# Altium PCB PCB_button.PcbDoc
Units mm, origin at the board's own origin, x right, y up, seen from the top; angles counter-clockwise.
Board outline 35.05 x 27.18 mm, 2 copper layers (Top Layer, Bottom Layer); 6 components, 12 nets, 42 pads, 4 vias.
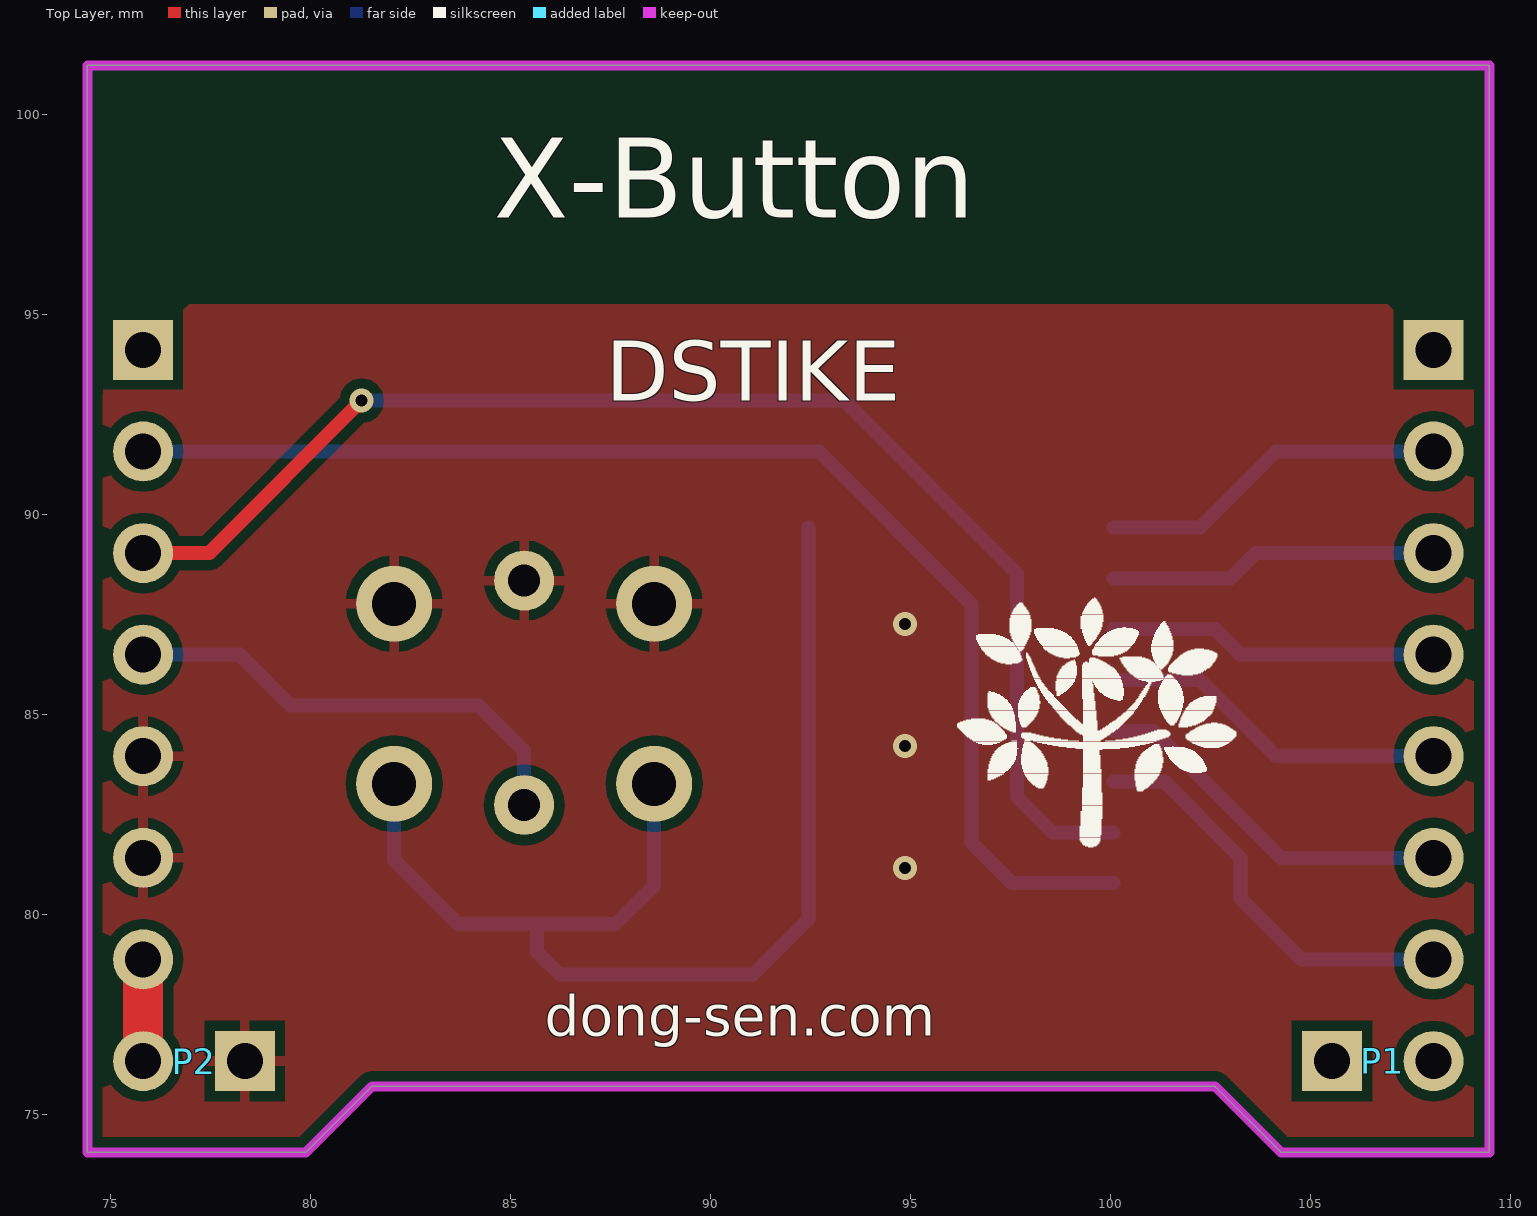
[diagram p0: Top Layer view]
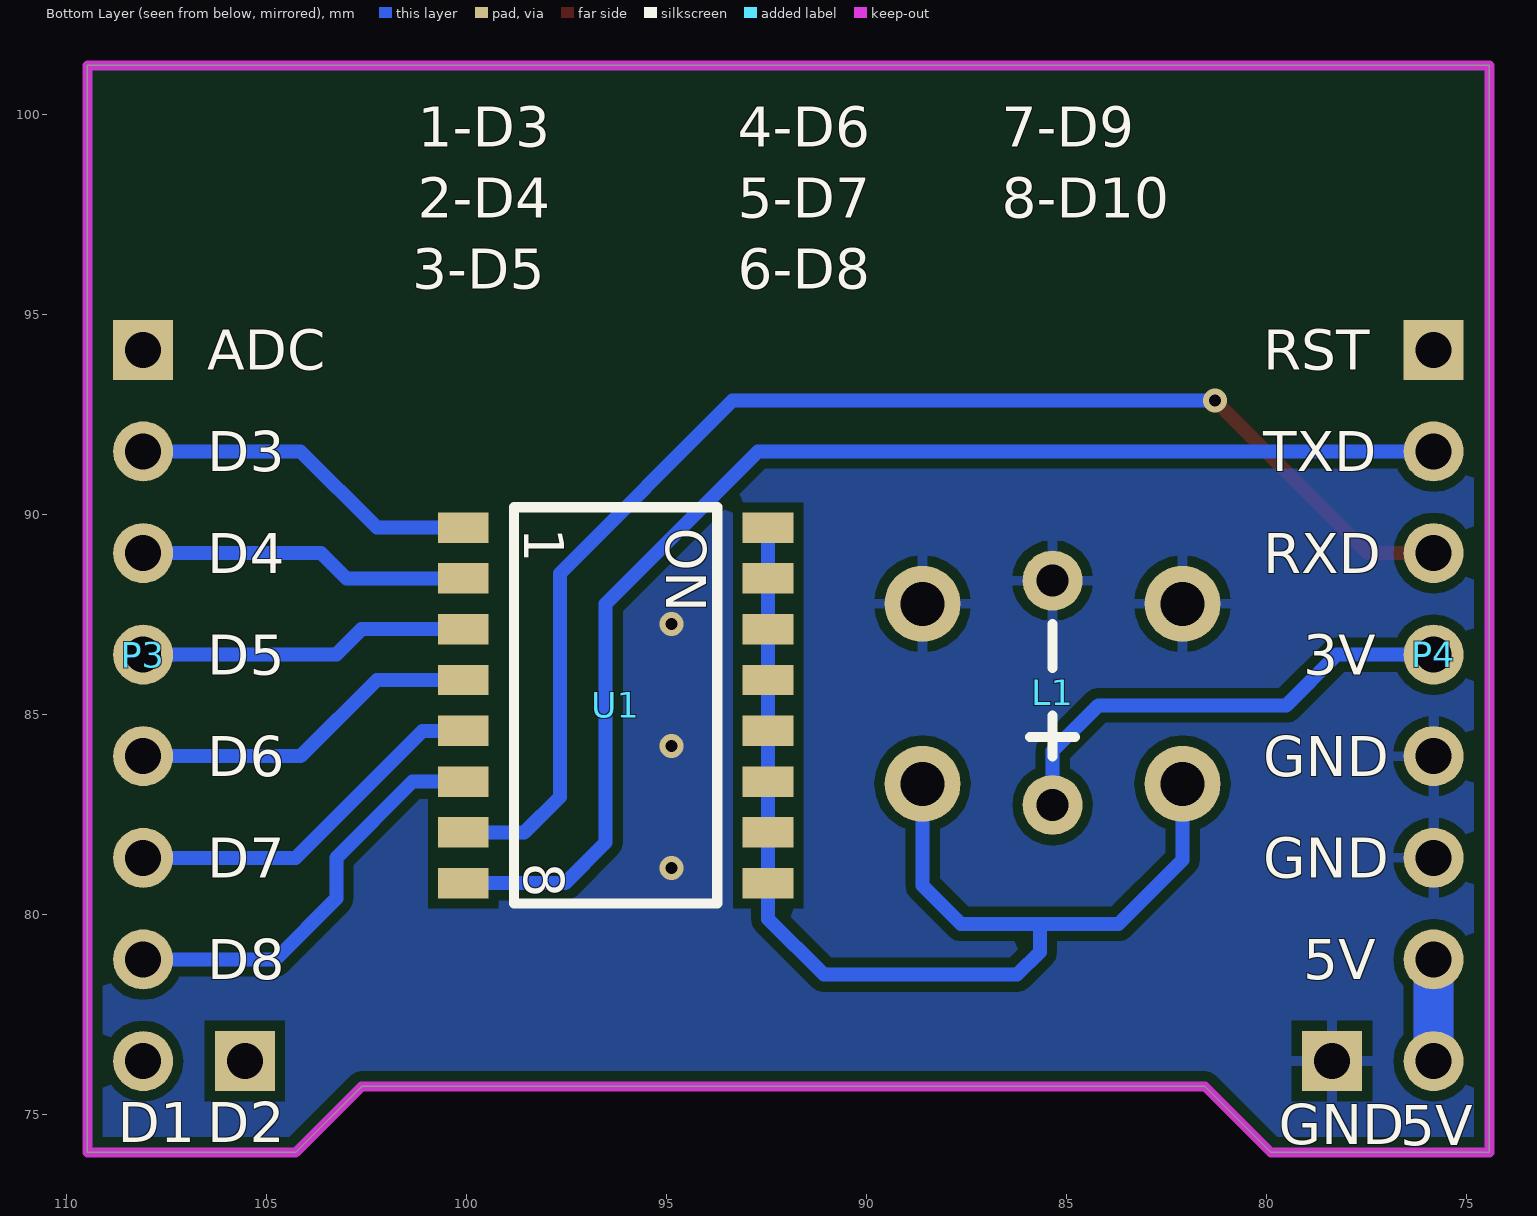
[diagram p1: Bottom Layer view, seen from below]

## Layer stack, top to bottom
Top Solder: solder mask 0.0102, Solder Resist, Dk 3.5
Top Layer: signal copper 0.0356
Dielectric 1: dielectric 0.32, FR-4, Dk 4.8
Bottom Layer: signal copper 0.0356
Bottom Solder: solder mask 0.0102, Solder Resist, Dk 3.5

## Board outline
74.422,74.041 74.422,101.219 109.474,101.219 109.474,74.041 104.267,74.041 102.616,75.692 81.534,75.692 79.883,74.041

## Design rules (kind name [scope] priority, off if disabled: settings)
Clearance [All] p1: gap=0.254
PolygonConnect PolygonConnect_via [IsVia] p1: connectstyle=Direct reliefconductorwidth=0.254 reliefentries=4 polygonreliefangle="90 Angle" airgapwidth=0.254
PolygonConnect [All] p2: connectstyle=Relief reliefconductorwidth=0.254 reliefentries=4 polygonreliefangle="90 Angle" airgapwidth=0.254
RoutingVias [All] p1: holewidth=0.711 width=1.27 viastyle="Through Hole" minholewidth=0.711 minwidth=1.27 maxholewidth=0.711 maxwidth=1.27
SolderMaskExpansion [All] p1: expansion=0.102
Width [All] p1: maxlimit=1 minlimit=0.254 preferedwidth=0.254
30 further rules are at their usual default settings.

## Components (designator, comment, footprint, x,y, rotation, side; value= is the part's Value field where it differs from the comment)
L1 "button" LEDBUTTON 85.344,87.757 r0 bottom
P1 "Header 2" HDR1X2 105.537,76.327 r0 top
P2 "Header 2" HDR1X2 78.359,76.327 r180 top
P3 "Header 7" HDR1X7 108.077,94.107 r270 bottom
P4 "Header 7" HDR1X7 75.819,94.107 r270 bottom
U1 "1.27mmSwitch" NUMBERSWITCH 100.076,89.662 r270 bottom

## Footprints (in the part's own frame and the unit in brackets; to place one, negate y for a bottom-side part, rotate by r counter-clockwise, add the part's x,y. Pads: shape width x height; smd on the part's side, far side on the other; paste and mask are expansions set on the pad)
HDR1X2 [mm] "Connector; Header; 2 Position"
  rect 1.5x1.5 hole 0.9: 1(0,0)
  round 1.5 hole 0.9: 2(2.54,0)
HDR1X7 [mm] "Connector; Header; 7 Position"
  rect 1.5x1.5 hole 0.9: 1(0,0)
  round 1.5 hole 0.9: 2(2.54,0) 3(5.08,0) 4(7.62,0) 5(10.16,0) 6(12.7,0) 7(15.24,0)
LEDBUTTON [mm]
  round 1.9 hole 1.1: 1(-3.25,4.5) 2(3.25,4.5) 5(3.25,0) 6(-3.25,0)
  round 1.5 hole 0.8: 3(0,5.029) 4(0,-0.581)
  silkscreen extent -0.56,0.51 0.56,3.81
NUMBERSWITCH [mm]
  rect 0.76x1.27 smd: 1(0,0) 2(1.27,0) 3(2.54,0) 4(3.81,0) 5(5.08,0) 6(6.35,0) 7(7.62,0) 8(8.89,0) 9(8.89,7.62) 10(7.62,7.62) 11(6.35,7.62) 12(5.08,7.62) 13(3.81,7.62) 14(2.54,7.62) 15(1.27,7.62) 16(0,7.62)
  silkscreen extent -0.51,1.27 9.4,6.35

## Part data
L1: library part LEDbutton, "蓝色LED按键"
P1 P2: "Header, 2-Pin"
P3 P4: "Header, 7-Pin"
U1: library part NumberSwitch, "拨码开关"

## Free pads (board coordinates)
  round 3 on Keep-Out: ""(76.962,98.679) ""(106.934,98.679)

## Via types
v1: diameter 0.6, hole 0.3, Top Layer to Bottom Layer, tented both sides, 4 vias

## Nets (pads, with @x,y where several pads share a name; then routed paths per layer and width w, separated by ;. In a path a pad name is that pad's centre, name@x,y a point inside that pad or via, vN(x,y) a via of type N, cw(c..) or ccw(c..) an arc to the next point about the centre after c; other vN are vias at no path point)
D3: P3.2 U1.1 | length 8.8
  Bottom Layer w0.35: U1.1 102.235,89.662 104.14,91.567 P3.2
D4: P3.3 U1.2 | length 8.3
  Bottom Layer w0.35: U1.2 102.997,88.392 103.632,89.027 P3.3
D5: P3.4 U1.3 | length 8.3
  Bottom Layer w0.35: U1.3 102.616,87.122 103.251,86.487 P3.4
D6: P3.5 U1.4 | length 8.8
  Bottom Layer w0.35: U1.4 102.235,85.852 104.14,83.947 P3.5
D7: P3.6 U1.5 | length 9.3
  Bottom Layer w0.35: U1.5 101.092,84.582 104.267,81.407 P3.6
D8: P3.7 U1.6 | length 10.4
  Bottom Layer w0.35: U1.6 101.346,83.312 103.251,81.407 103.251,80.391 104.775,78.867 P3.7
D9: P4.3 U1.7 | length 33.6
  Top Layer w0.35: P4.3 77.47,89.027 v1(81.28,92.837)
  Bottom Layer w0.35: v1(81.28,92.837) 93.345,92.837 97.663,88.519 97.663,82.931 98.552,82.042 U1.7
D10: P4.2 U1.8 | length 32.2
  Bottom Layer w0.35: P4.2 92.71,91.567 96.52,87.757 96.52,81.788 97.536,80.772 U1.8
GND: L1.4 L1.5 L1.6 P2.1 P4.5 P4.6
  other v1: 94.869,81.153 94.869,84.201 94.869,87.249
NetL1_1: L1.1 L1.2 U1.9 U1.10 U1.11 U1.12 U1.13 U1.14 U1.15 U1.16 | length 30.8
  Bottom Layer w0.35: L1.1 82.094,81.355 83.693,79.756 85.661,79.756 ; L1.2@89.35,83.257 L1.2 88.594,80.72 87.63,79.756 85.661,79.756 ; U1.16 U1.15 U1.14 U1.13 U1.12 U1.11 U1.10 U1.9 92.456,79.883 91.059,78.486 86.233,78.486 85.661,79.057 85.661,79.756
VCC_3V: L1.3 P4.4 | length 11.9
  Bottom Layer w0.35: P4.4 78.232,86.487 79.502,85.217 84.201,85.217 85.344,84.074 L1.3
VCC_5V: P2.2 P4.7 | length 5.1
  Top Layer w1: P2.2 P4.7
  Bottom Layer w1: P2.2 P4.7
pads on no net: P1.1 P1.2 P3.1 P4.1

## Polygon pours and split planes (outlines as drawn)
GND on Bottom Layer "Bottom_GND" (solid, remove dead copper, pour order 10): 74.422,95.377 74.549,95.25 109.474,95.25 109.474,74.295 109.22,74.041 74.422,74.041
GND on Top Layer "Bottom_GND" (solid, remove dead copper, pour order 12): 74.422,95.25 109.474,95.25 109.474,74.041 74.549,74.041 74.422,74.168

## Keep-outs
Keep-Out Layer:
  the board outline again, w0.254

## Silkscreen, mask and mechanical layers (free items; w line width, h text height)
Top Overlay:
  drawing of 1036 lines, arcs and shapes, not listed
  text "X-Button" at 84.582,97.409 h2
  text "DSTIKE" at 87.376,92.837 h1.5
  text "dong-sen.com" at 85.852,76.962 h1
Bottom Overlay:
  text "7-D9" at 86.614,99.187 h1
  text "4-D6" at 93.218,99.187 h1
  text "1-D3" at 101.219,99.187 h1
  text "8-D10" at 86.614,97.409 h1
  text "5-D7" at 93.218,97.409 h1
  text "2-D4" at 101.219,97.409 h1
  text "6-D8" at 93.218,95.631 h1
  text "3-D5" at 101.346,95.631 h1
  text "RST" at 80.073,93.607 h1
  text "ADC" at 106.477,93.607 h1
  text "TXD" at 80.073,91.067 h1
  text "D3" at 106.477,91.067 h1
  text "RXD" at 80.073,88.527 h1
  text "D4" at 106.477,88.527 h1
  text "3V" at 79.073,85.987 h1
  text "D5" at 106.477,85.987 h1
  text "GND" at 80.073,83.447 h1
  text "D6" at 106.477,83.447 h1
  text "GND" at 80.073,80.907 h1
  text "D7" at 106.477,80.907 h1
  text "5V" at 79.073,78.367 h1
  text "D8" at 106.477,78.367 h1
  text "D2" at 106.477,74.295 h1
  text "D1" at 108.712,74.295 h1
  text "GND" at 79.692,74.252 h1
  text "5V" at 76.652,74.227 h1

## Text inside footprints (layer, text, board x,y; h text height)
U1: Bottom Overlay "8" at 98.552,81.28 h1 r90; Bottom Overlay "1" at 98.552,89.662 h1 r90; Bottom Overlay "ON" at 94.996,89.662 h1 r90